# EAGLE board panelized (EAGLE 9.1.3)
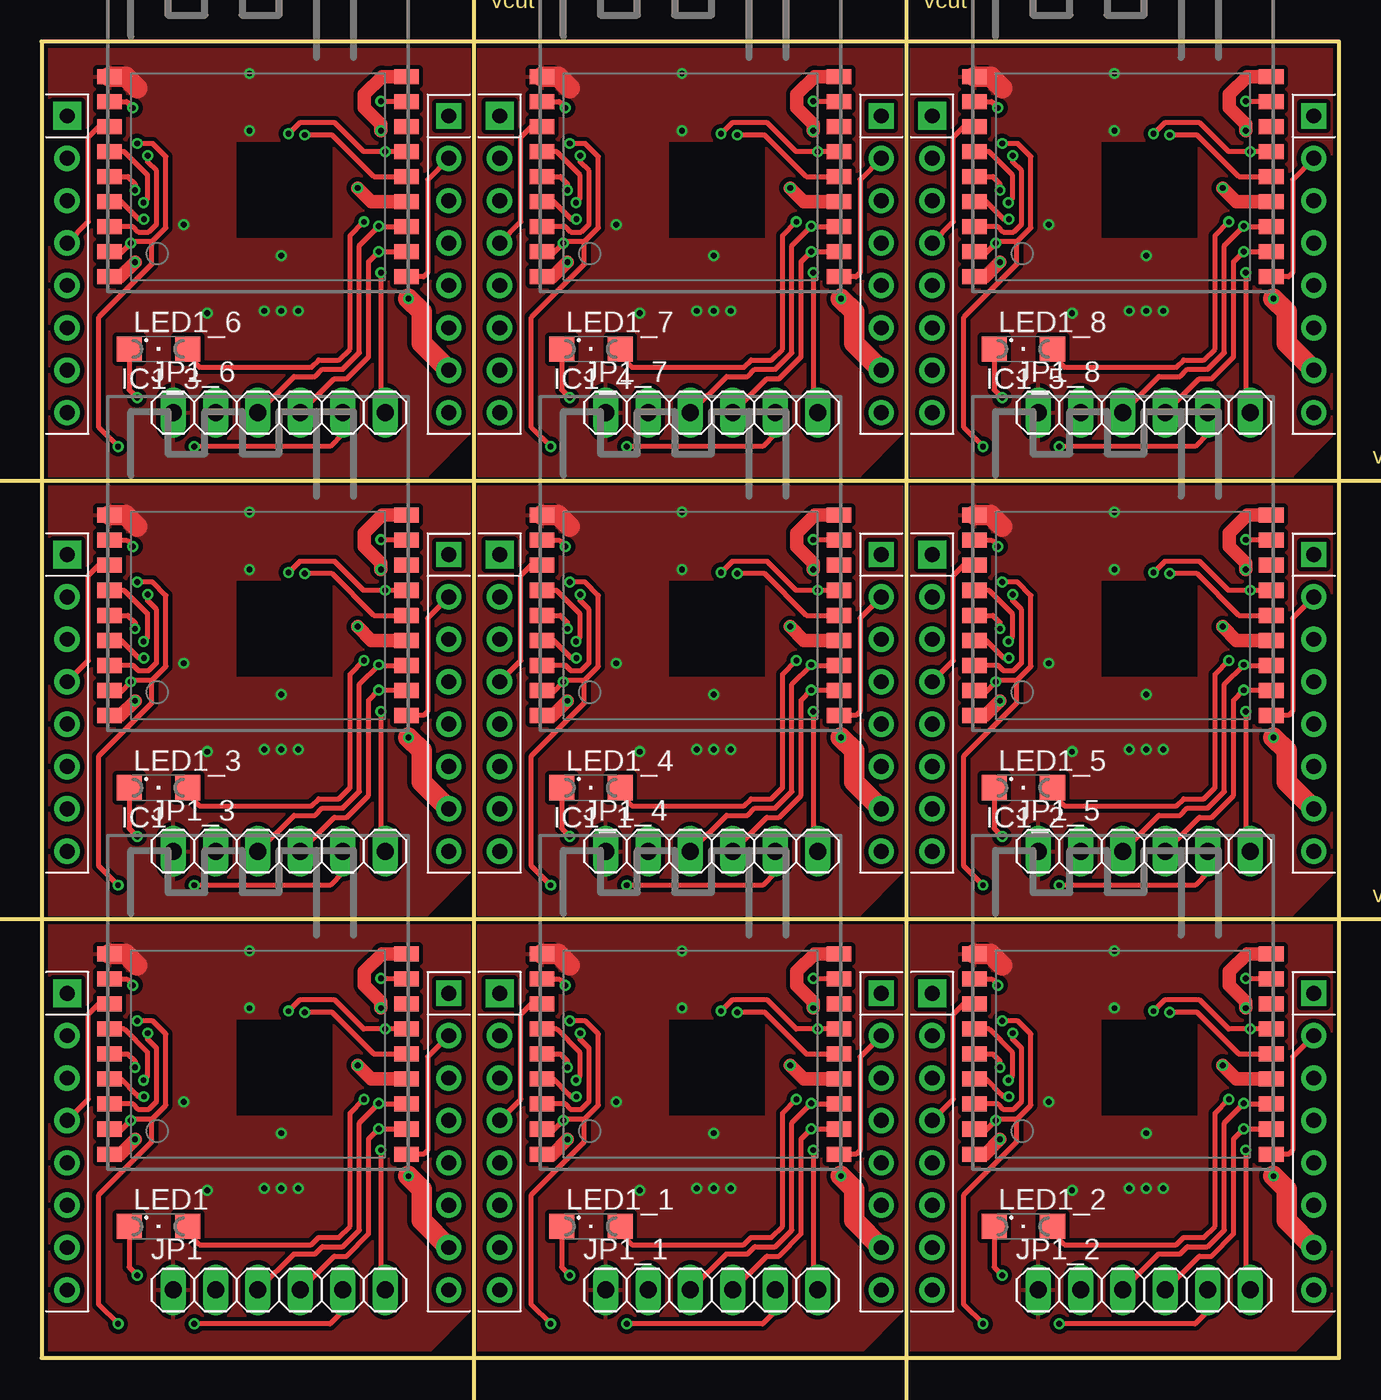
[diagram p0: board, top side]
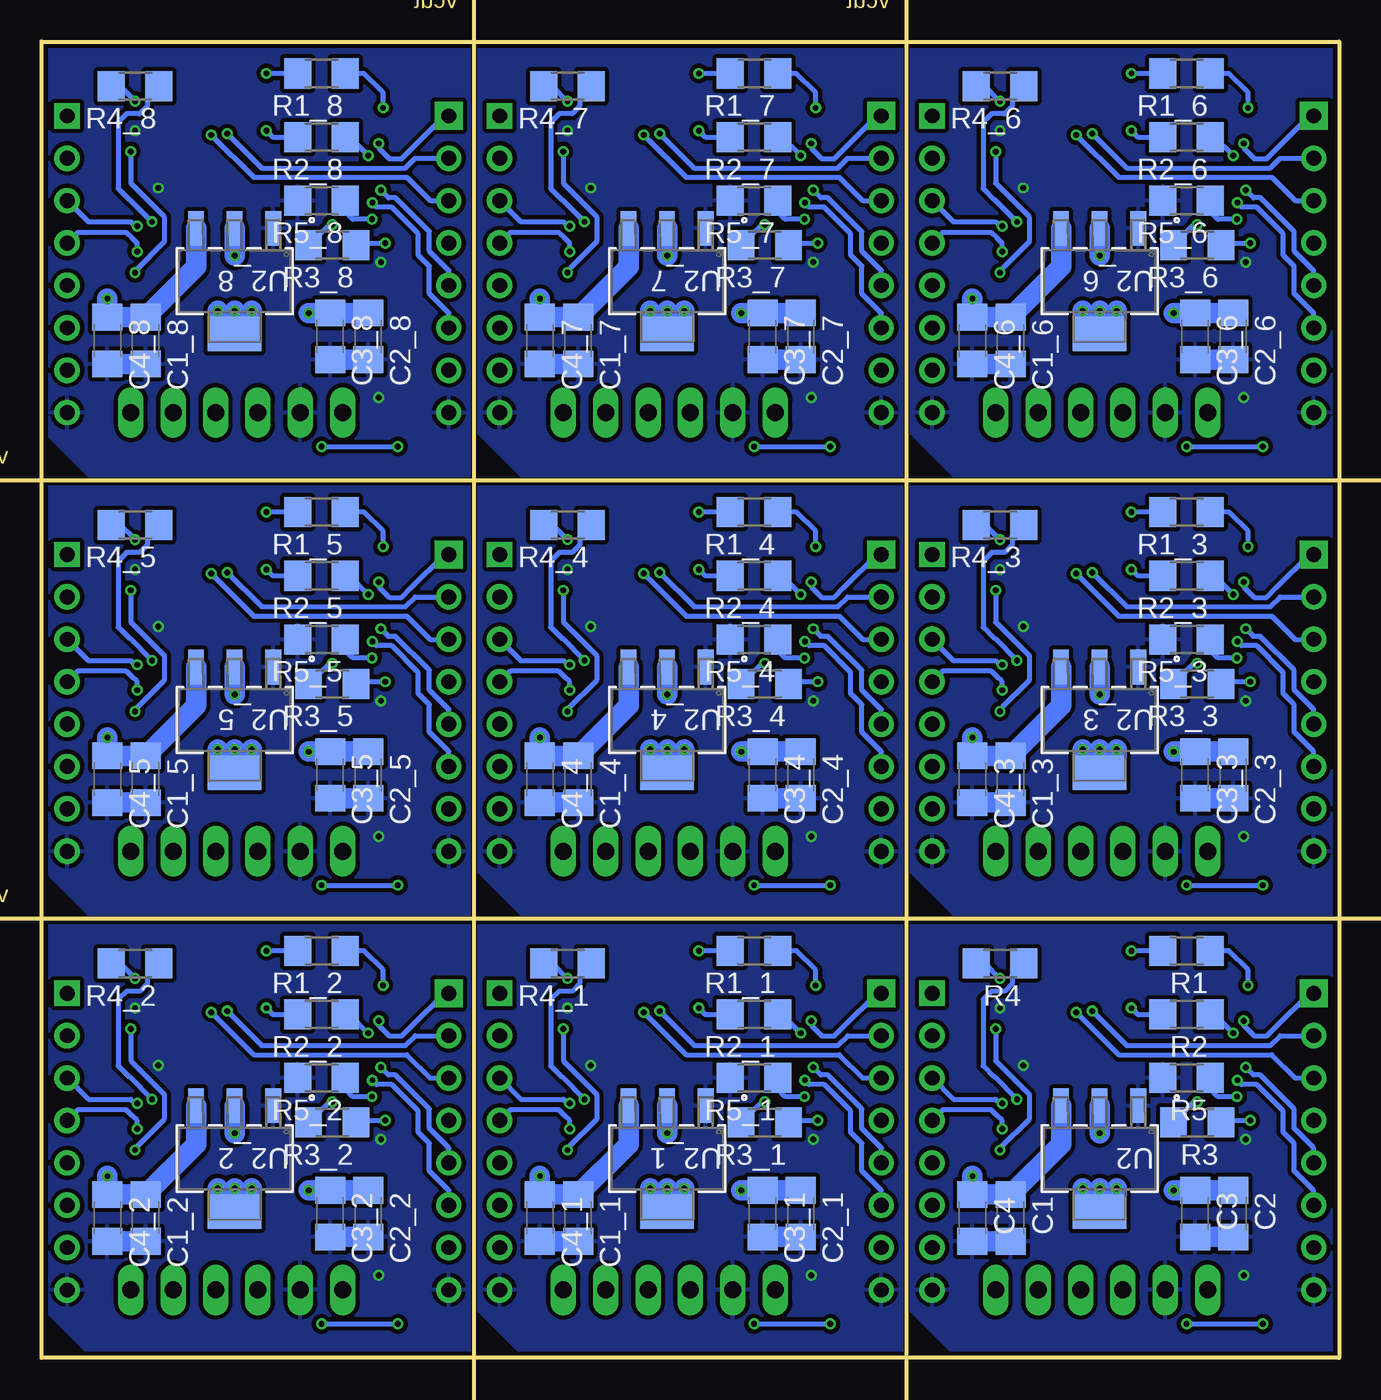
[diagram p1: board, bottom side, seen from below]

Size 77.72 x 78.87 mm. Coordinates in mm from the lower left corner, seen from the top.
Outline: 0,0 77.72,0 77.72,78.87 0,78.87 0,0
Copper layers (1*16): Top 0.035mm / dielectric 1.5mm / Bottom 0.035mm
Design rules "BrainPadWiFi": minimum track width 6mil, minimum drill 12mil, track to track 10mil, track to pad 10mil, pad to pad 0.205mm, via to via 0.205mm, smd to smd 0mil, copper to edge 10mil, drill to drill 10mil, minimum pad ring 10mil, minimum via ring 6mil, stop-mask expansion 2mil, vias tented up to drill 100mil, thermal gap 10mil
Milling: 4 lines

## Footprints (pad centres in the part's own frame; a part is rotated, then mirrored left to right if it is on the bottom)
C1206 = smd 1.6 x 1.8: 1 -1.4,0; 2 1.4,0
FRONT-FACE = smd 1.485 x 0.9: 1 -8.893,4.9; 2 -8.893,3.4; 3 -8.893,1.9; 4 -8.893,0.4; 5 -8.893,-1.1; 6 -8.893,-2.6; 7 -8.893,-4.1; 8 -8.893,-5.6; 9 -8.893,-7.1; 10 8.893,-7.1; 11 8.893,-5.6; 12 8.893,-4.1; 13 8.893,-2.6; 14 8.893,-1.1; 15 8.893,0.4; 16 8.893,1.9; 17 8.893,3.4; 18 8.893,4.9
1X06 = drill 1.016 long: 1 -6.35,0; 2 -3.81,0; 3 -1.27,0; 4 1.27,0; 5 3.81,0; 6 6.35,0
SML1206 = smd 1.5 x 1.5: A 1.75,0; C -1.75,0
R1206 = smd 1.6 x 1.803: 1 -1.422,0; 2 1.422,0
DCY4-M = smd 0.94 x 2.07: 1 -2.311,-3.169; 2 0,-3.169; 3 2.311,-3.169 | smd 3.2 x 2.07: 4 0,3.169
MIKROE_BUS_MINI = drill 0.889 pad 1.676 square: P$1 1.27,21.59 | drill 0.889 pad 1.524: P$2 1.27,19.05; P$3 1.27,16.51; P$4 1.27,13.97; P$5 1.27,11.43; P$6 1.27,8.89; P$7 1.27,6.35; P$8 1.27,3.81; P$9 24.13,3.81; P$10 24.13,6.35; P$11 24.13,8.89; P$12 24.13,11.43; P$13 24.13,13.97; P$14 24.13,16.51; P$15 24.13,19.05 | drill 0.889 pad 1.524 square: P$16 24.13,21.59

## Placement (x,y rotation side)
C1  47u  [C1206]  19.68,8.38 270 bottom
C1_1  47u  [C1206]  45.59,8.38 270 bottom
C1_2  47u  [C1206]  71.5,8.38 270 bottom
C1_3  47u  [C1206]  19.68,34.67 270 bottom
C1_4  47u  [C1206]  45.59,34.67 270 bottom
C1_5  47u  [C1206]  71.5,34.67 270 bottom
C1_6  47u  [C1206]  19.68,60.96 270 bottom
C1_7  47u  [C1206]  45.59,60.96 270 bottom
C1_8  47u  [C1206]  71.5,60.96 270 bottom
C2  0.47u  [C1206]  6.35,8.64 270 bottom
C2_1  0.47u  [C1206]  32.26,8.64 270 bottom
C2_2  0.47u  [C1206]  58.17,8.64 270 bottom
C2_3  0.47u  [C1206]  6.35,34.92 270 bottom
C2_4  0.47u  [C1206]  32.26,34.92 270 bottom
C2_5  0.47u  [C1206]  58.17,34.92 270 bottom
C2_6  0.47u  [C1206]  6.35,61.21 270 bottom
C2_7  0.47u  [C1206]  32.26,61.21 270 bottom
C2_8  0.47u  [C1206]  58.17,61.21 270 bottom
C3  47u  [C1206]  8.64,8.64 270 bottom
C3_1  47u  [C1206]  34.54,8.64 270 bottom
C3_2  47u  [C1206]  60.45,8.64 270 bottom
C3_3  47u  [C1206]  8.64,34.92 270 bottom
C3_4  47u  [C1206]  34.54,34.92 270 bottom
C3_5  47u  [C1206]  60.45,34.92 270 bottom
C3_6  47u  [C1206]  8.64,61.21 270 bottom
C3_7  47u  [C1206]  34.54,61.21 270 bottom
C3_8  47u  [C1206]  60.45,61.21 270 bottom
C4  0.47u  [C1206]  21.97,8.38 270 bottom
C4_1  0.47u  [C1206]  47.88,8.38 270 bottom
C4_2  0.47u  [C1206]  73.79,8.38 270 bottom
C4_3  0.47u  [C1206]  21.97,34.67 270 bottom
C4_4  0.47u  [C1206]  47.88,34.67 270 bottom
C4_5  0.47u  [C1206]  73.79,34.67 270 bottom
C4_6  0.47u  [C1206]  21.97,60.96 270 bottom
C4_7  0.47u  [C1206]  47.88,60.96 270 bottom
C4_8  0.47u  [C1206]  73.79,60.96 270 bottom
IC1  ESP-WROOM-02FRONT-FACE  [FRONT-FACE]  12.95,19.3 0 top
IC1_1  ESP-WROOM-02FRONT-FACE  [FRONT-FACE]  38.86,19.3 0 top
IC1_2  ESP-WROOM-02FRONT-FACE  [FRONT-FACE]  64.77,19.3 0 top
IC1_3  ESP-WROOM-02FRONT-FACE  [FRONT-FACE]  12.95,45.59 0 top
IC1_4  ESP-WROOM-02FRONT-FACE  [FRONT-FACE]  38.86,45.59 0 top
IC1_5  ESP-WROOM-02FRONT-FACE  [FRONT-FACE]  64.77,45.59 0 top
IC1_6  ESP-WROOM-02FRONT-FACE  [FRONT-FACE]  12.95,71.88 0 top
IC1_7  ESP-WROOM-02FRONT-FACE  [FRONT-FACE]  38.86,71.88 0 top
IC1_8  ESP-WROOM-02FRONT-FACE  [FRONT-FACE]  64.77,71.88 0 top
JP1  JP1  [1X06]  14.22,4.06 0 top
JP1_1  JP1  [1X06]  40.13,4.06 0 top
JP1_2  JP1  [1X06]  66.04,4.06 0 top
JP1_3  JP1  [1X06]  14.22,30.35 0 top
JP1_4  JP1  [1X06]  40.13,30.35 0 top
JP1_5  JP1  [1X06]  66.04,30.35 0 top
JP1_6  JP1  [1X06]  14.22,56.64 0 top
JP1_7  JP1  [1X06]  40.13,56.64 0 top
JP1_8  JP1  [1X06]  66.04,56.64 0 top
LED1  STATUS  [SML1206]  6.99,7.87 0 top
LED1_1  STATUS  [SML1206]  32.89,7.87 0 top
LED1_2  STATUS  [SML1206]  58.8,7.87 0 top
LED1_3  STATUS  [SML1206]  6.99,34.16 0 top
LED1_4  STATUS  [SML1206]  32.89,34.16 0 top
LED1_5  STATUS  [SML1206]  58.8,34.16 0 top
LED1_6  STATUS  [SML1206]  6.99,60.45 0 top
LED1_7  STATUS  [SML1206]  32.89,60.45 0 top
LED1_8  STATUS  [SML1206]  58.8,60.45 0 top
R1  10K  [R1206]  9.14,24.38 180 bottom
R1_1  10K  [R1206]  35.05,24.38 180 bottom
R1_2  10K  [R1206]  60.96,24.38 180 bottom
R1_3  10K  [R1206]  9.14,50.67 180 bottom
R1_4  10K  [R1206]  35.05,50.67 180 bottom
R1_5  10K  [R1206]  60.96,50.67 180 bottom
R1_6  10K  [R1206]  9.14,76.96 180 bottom
R1_7  10K  [R1206]  35.05,76.96 180 bottom
R1_8  10K  [R1206]  60.96,76.96 180 bottom
R2  10K  [R1206]  9.14,20.57 180 bottom
R2_1  10K  [R1206]  35.05,20.57 180 bottom
R2_2  10K  [R1206]  60.96,20.57 180 bottom
R2_3  10K  [R1206]  9.14,46.86 180 bottom
R2_4  10K  [R1206]  35.05,46.86 180 bottom
R2_5  10K  [R1206]  60.96,46.86 180 bottom
R2_6  10K  [R1206]  9.14,73.15 180 bottom
R2_7  10K  [R1206]  35.05,73.15 180 bottom
R2_8  10K  [R1206]  60.96,73.15 180 bottom
R3  10K  [R1206]  8.51,14.1 180 bottom
R3_1  10K  [R1206]  34.42,14.1 180 bottom
R3_2  10K  [R1206]  60.33,14.1 180 bottom
R3_3  10K  [R1206]  8.51,40.39 180 bottom
R3_4  10K  [R1206]  34.42,40.39 180 bottom
R3_5  10K  [R1206]  60.33,40.39 180 bottom
R3_6  10K  [R1206]  8.51,66.67 180 bottom
R3_7  10K  [R1206]  34.42,66.67 180 bottom
R3_8  10K  [R1206]  60.33,66.67 180 bottom
R4  470  [R1206]  20.32,23.62 180 bottom
R4_1  470  [R1206]  46.23,23.62 180 bottom
R4_2  470  [R1206]  72.14,23.62 180 bottom
R4_3  470  [R1206]  20.32,49.91 180 bottom
R4_4  470  [R1206]  46.23,49.91 180 bottom
R4_5  470  [R1206]  72.14,49.91 180 bottom
R4_6  470  [R1206]  20.32,76.2 180 bottom
R4_7  470  [R1206]  46.23,76.2 180 bottom
R4_8  470  [R1206]  72.14,76.2 180 bottom
R5  10K  [R1206]  9.14,16.76 180 bottom
R5_1  10K  [R1206]  35.05,16.76 180 bottom
R5_2  10K  [R1206]  60.96,16.76 180 bottom
R5_3  10K  [R1206]  9.14,43.05 180 bottom
R5_4  10K  [R1206]  35.05,43.05 180 bottom
R5_5  10K  [R1206]  60.96,43.05 180 bottom
R5_6  10K  [R1206]  9.14,69.34 180 bottom
R5_7  10K  [R1206]  35.05,69.34 180 bottom
R5_8  10K  [R1206]  60.96,69.34 180 bottom
U2  TLV1117LV33DCYRDCY4-M  [DCY4-M]  14.35,11.94 180 bottom
U2_1  TLV1117LV33DCYRDCY4-M  [DCY4-M]  40.26,11.94 180 bottom
U2_2  TLV1117LV33DCYRDCY4-M  [DCY4-M]  66.17,11.94 180 bottom
U2_3  TLV1117LV33DCYRDCY4-M  [DCY4-M]  14.35,38.23 180 bottom
U2_4  TLV1117LV33DCYRDCY4-M  [DCY4-M]  40.26,38.23 180 bottom
U2_5  TLV1117LV33DCYRDCY4-M  [DCY4-M]  66.17,38.23 180 bottom
U2_6  TLV1117LV33DCYRDCY4-M  [DCY4-M]  14.35,64.52 180 bottom
U2_7  TLV1117LV33DCYRDCY4-M  [DCY4-M]  40.26,64.52 180 bottom
U2_8  TLV1117LV33DCYRDCY4-M  [DCY4-M]  66.17,64.52 180 bottom
U$1  MIKROE_CLICKMINI  [MIKROE_BUS_MINI]  0.25,0.25 0 top
U$1_1  MIKROE_CLICKMINI  [MIKROE_BUS_MINI]  26.16,0.25 0 top
U$1_2  MIKROE_CLICKMINI  [MIKROE_BUS_MINI]  52.07,0.25 0 top
U$1_3  MIKROE_CLICKMINI  [MIKROE_BUS_MINI]  0.25,26.54 0 top
U$1_4  MIKROE_CLICKMINI  [MIKROE_BUS_MINI]  26.16,26.54 0 top
U$1_5  MIKROE_CLICKMINI  [MIKROE_BUS_MINI]  52.07,26.54 0 top
U$1_6  MIKROE_CLICKMINI  [MIKROE_BUS_MINI]  0.25,52.83 0 top
U$1_7  MIKROE_CLICKMINI  [MIKROE_BUS_MINI]  26.16,52.83 0 top
U$1_8  MIKROE_CLICKMINI  [MIKROE_BUS_MINI]  52.07,52.83 0 top

## Library data of the parts
C1 C1_1-C1_8 C2 C2_1-C2_8 C3 C3_1-C3_8 C4 C4_1-C4_8 IC1 IC1_1-IC1_8 JP1 JP1_1-JP1_8 LED1 LED1_1-LED1_8 R1 R1_1-R1_8 R2 R2_1-R2_8 R3 R3_1-R3_8 R4 R4_1-R4_8 R5 R5_1-R5_8 U$1 U$1_1-U$1_8 = BrainPadWiFi
U2 U2_1-U2_8 = BrainPadWiFi; MANUFACTURER_PART_NUMBER: TLV1117LV33DCYR; VENDOR: Texas Instruments

## Nets
3V3: C2.1 C3.1 IC1.1 JP1.1 R1.2 R2.2 R3.2 U2.2 U2.4
3V3_1: C2_1.1 C3_1.1 IC1_1.1 JP1_1.1 R1_1.2 R2_1.2 R3_1.2 U2_1.2 U2_1.4
3V3_2: C2_2.1 C3_2.1 IC1_2.1 JP1_2.1 R1_2.2 R2_2.2 R3_2.2 U2_2.2 U2_2.4
3V3_3: C2_3.1 C3_3.1 IC1_3.1 JP1_3.1 R1_3.2 R2_3.2 R3_3.2 U2_3.2 U2_3.4
3V3_4: C2_4.1 C3_4.1 IC1_4.1 JP1_4.1 R1_4.2 R2_4.2 R3_4.2 U2_4.2 U2_4.4
3V3_5: C2_5.1 C3_5.1 IC1_5.1 JP1_5.1 R1_5.2 R2_5.2 R3_5.2 U2_5.2 U2_5.4
3V3_6: C2_6.1 C3_6.1 IC1_6.1 JP1_6.1 R1_6.2 R2_6.2 R3_6.2 U2_6.2 U2_6.4
3V3_7: C2_7.1 C3_7.1 IC1_7.1 JP1_7.1 R1_7.2 R2_7.2 R3_7.2 U2_7.2 U2_7.4
3V3_8: C2_8.1 C3_8.1 IC1_8.1 JP1_8.1 R1_8.2 R2_8.2 R3_8.2 U2_8.2 U2_8.4
5V: C1.1 C4.1 U2.3 U$1.P$10
5V_1: C1_1.1 C4_1.1 U2_1.3 U$1_1.P$10
5V_2: C1_2.1 C4_2.1 U2_2.3 U$1_2.P$10
5V_3: C1_3.1 C4_3.1 U2_3.3 U$1_3.P$10
5V_4: C1_4.1 C4_4.1 U2_4.3 U$1_4.P$10
5V_5: C1_5.1 C4_5.1 U2_5.3 U$1_5.P$10
5V_6: C1_6.1 C4_6.1 U2_6.3 U$1_6.P$10
5V_7: C1_7.1 C4_7.1 U2_7.3 U$1_7.P$10
5V_8: C1_8.1 C4_8.1 U2_8.3 U$1_8.P$10
CS: IC1.14 U$1.P$3
CS_1: IC1_1.14 U$1_1.P$3
CS_2: IC1_2.14 U$1_2.P$3
CS_3: IC1_3.14 U$1_3.P$3
CS_4: IC1_4.14 U$1_4.P$3
CS_5: IC1_5.14 U$1_5.P$3
CS_6: IC1_6.14 U$1_6.P$3
CS_7: IC1_7.14 U$1_7.P$3
CS_8: IC1_8.14 U$1_8.P$3
EN: IC1.2 R1.1
EN_1: IC1_1.2 R1_1.1
EN_2: IC1_2.2 R1_2.1
EN_3: IC1_3.2 R1_3.1
EN_4: IC1_4.2 R1_4.1
EN_5: IC1_5.2 R1_5.1
EN_6: IC1_6.2 R1_6.1
EN_7: IC1_7.2 R1_7.1
EN_8: IC1_8.2 R1_8.1
GND: C1.2 C2.2 C3.2 C4.2 IC1.9 IC1.13 IC1.18 JP1.2 LED1.C R5.2 U2.1 U$1.P$8 U$1.P$9
GND_1: C1_1.2 C2_1.2 C3_1.2 C4_1.2 IC1_1.9 IC1_1.13 IC1_1.18 JP1_1.2 LED1_1.C R5_1.2 U2_1.1 U$1_1.P$8 U$1_1.P$9
GND_2: C1_2.2 C2_2.2 C3_2.2 C4_2.2 IC1_2.9 IC1_2.13 IC1_2.18 JP1_2.2 LED1_2.C R5_2.2 U2_2.1 U$1_2.P$8 U$1_2.P$9
GND_3: C1_3.2 C2_3.2 C3_3.2 C4_3.2 IC1_3.9 IC1_3.13 IC1_3.18 JP1_3.2 LED1_3.C R5_3.2 U2_3.1 U$1_3.P$8 U$1_3.P$9
GND_4: C1_4.2 C2_4.2 C3_4.2 C4_4.2 IC1_4.9 IC1_4.13 IC1_4.18 JP1_4.2 LED1_4.C R5_4.2 U2_4.1 U$1_4.P$8 U$1_4.P$9
GND_5: C1_5.2 C2_5.2 C3_5.2 C4_5.2 IC1_5.9 IC1_5.13 IC1_5.18 JP1_5.2 LED1_5.C R5_5.2 U2_5.1 U$1_5.P$8 U$1_5.P$9
GND_6: C1_6.2 C2_6.2 C3_6.2 C4_6.2 IC1_6.9 IC1_6.13 IC1_6.18 JP1_6.2 LED1_6.C R5_6.2 U2_6.1 U$1_6.P$8 U$1_6.P$9
GND_7: C1_7.2 C2_7.2 C3_7.2 C4_7.2 IC1_7.9 IC1_7.13 IC1_7.18 JP1_7.2 LED1_7.C R5_7.2 U2_7.1 U$1_7.P$8 U$1_7.P$9
GND_8: C1_8.2 C2_8.2 C3_8.2 C4_8.2 IC1_8.9 IC1_8.13 IC1_8.18 JP1_8.2 LED1_8.C R5_8.2 U2_8.1 U$1_8.P$8 U$1_8.P$9
INT: IC1.10 U$1.P$15
INT_1: IC1_1.10 U$1_1.P$15
INT_2: IC1_2.10 U$1_2.P$15
INT_3: IC1_3.10 U$1_3.P$15
INT_4: IC1_4.10 U$1_4.P$15
INT_5: IC1_5.10 U$1_5.P$15
INT_6: IC1_6.10 U$1_6.P$15
INT_7: IC1_7.10 U$1_7.P$15
INT_8: IC1_8.10 U$1_8.P$15
IO16: IC1.17 R4.2
IO16_1: IC1_1.17 R4_1.2
IO16_2: IC1_2.17 R4_2.2
IO16_3: IC1_3.17 R4_3.2
IO16_4: IC1_4.17 R4_4.2
IO16_5: IC1_5.17 R4_5.2
IO16_6: IC1_6.17 R4_6.2
IO16_7: IC1_7.17 R4_7.2
IO16_8: IC1_8.17 R4_8.2
MISO: IC1.5 U$1.P$5
MISO_1: IC1_1.5 U$1_1.P$5
MISO_2: IC1_2.5 U$1_2.P$5
MISO_3: IC1_3.5 U$1_3.P$5
MISO_4: IC1_4.5 U$1_4.P$5
MISO_5: IC1_5.5 U$1_5.P$5
MISO_6: IC1_6.5 U$1_6.P$5
MISO_7: IC1_7.5 U$1_7.P$5
MISO_8: IC1_8.5 U$1_8.P$5
MOSI: IC1.4 U$1.P$6
MOSI_1: IC1_1.4 U$1_1.P$6
MOSI_2: IC1_2.4 U$1_2.P$6
MOSI_3: IC1_3.4 U$1_3.P$6
MOSI_4: IC1_4.4 U$1_4.P$6
MOSI_5: IC1_5.4 U$1_5.P$6
MOSI_6: IC1_6.4 U$1_6.P$6
MOSI_7: IC1_7.4 U$1_7.P$6
MOSI_8: IC1_8.4 U$1_8.P$6
N$1: IC1.7 R2.1
N$1_1: IC1_1.7 R2_1.1
N$1_2: IC1_2.7 R2_2.1
N$1_3: IC1_3.7 R2_3.1
N$1_4: IC1_4.7 R2_4.1
N$1_5: IC1_5.7 R2_5.1
N$1_6: IC1_6.7 R2_6.1
N$1_7: IC1_7.7 R2_7.1
N$1_8: IC1_8.7 R2_8.1
N$4: IC1.6 R5.1
N$4_1: IC1_1.6 R5_1.1
N$4_2: IC1_2.6 R5_2.1
N$4_3: IC1_3.6 R5_3.1
N$4_4: IC1_4.6 R5_4.1
N$4_5: IC1_5.6 R5_5.1
N$4_6: IC1_6.6 R5_6.1
N$4_7: IC1_7.6 R5_7.1
N$4_8: IC1_8.6 R5_8.1
PROG: IC1.8 JP1.5 R3.1 U$1.P$1
PROG_1: IC1_1.8 JP1_1.5 R3_1.1 U$1_1.P$1
PROG_2: IC1_2.8 JP1_2.5 R3_2.1 U$1_2.P$1
PROG_3: IC1_3.8 JP1_3.5 R3_3.1 U$1_3.P$1
PROG_4: IC1_4.8 JP1_4.5 R3_4.1 U$1_4.P$1
PROG_5: IC1_5.8 JP1_5.5 R3_5.1 U$1_5.P$1
PROG_6: IC1_6.8 JP1_6.5 R3_6.1 U$1_6.P$1
PROG_7: IC1_7.8 JP1_7.5 R3_7.1 U$1_7.P$1
PROG_8: IC1_8.8 JP1_8.5 R3_8.1 U$1_8.P$1
RST: IC1.15 JP1.6 U$1.P$2
RST_1: IC1_1.15 JP1_1.6 U$1_1.P$2
RST_2: IC1_2.15 JP1_2.6 U$1_2.P$2
RST_3: IC1_3.15 JP1_3.6 U$1_3.P$2
RST_4: IC1_4.15 JP1_4.6 U$1_4.P$2
RST_5: IC1_5.15 JP1_5.6 U$1_5.P$2
RST_6: IC1_6.15 JP1_6.6 U$1_6.P$2
RST_7: IC1_7.15 JP1_7.6 U$1_7.P$2
RST_8: IC1_8.15 JP1_8.6 U$1_8.P$2
RX: IC1.12 JP1.3 U$1.P$14
RX_1: IC1_1.12 JP1_1.3 U$1_1.P$14
RX_2: IC1_2.12 JP1_2.3 U$1_2.P$14
RX_3: IC1_3.12 JP1_3.3 U$1_3.P$14
RX_4: IC1_4.12 JP1_4.3 U$1_4.P$14
RX_5: IC1_5.12 JP1_5.3 U$1_5.P$14
RX_6: IC1_6.12 JP1_6.3 U$1_6.P$14
RX_7: IC1_7.12 JP1_7.3 U$1_7.P$14
RX_8: IC1_8.12 JP1_8.3 U$1_8.P$14
SCK: IC1.3 U$1.P$4
SCK_1: IC1_1.3 U$1_1.P$4
SCK_2: IC1_2.3 U$1_2.P$4
SCK_3: IC1_3.3 U$1_3.P$4
SCK_4: IC1_4.3 U$1_4.P$4
SCK_5: IC1_5.3 U$1_5.P$4
SCK_6: IC1_6.3 U$1_6.P$4
SCK_7: IC1_7.3 U$1_7.P$4
SCK_8: IC1_8.3 U$1_8.P$4
STAT: LED1.A R4.1
STAT_1: LED1_1.A R4_1.1
STAT_2: LED1_2.A R4_2.1
STAT_3: LED1_3.A R4_3.1
STAT_4: LED1_4.A R4_4.1
STAT_5: LED1_5.A R4_5.1
STAT_6: LED1_6.A R4_6.1
STAT_7: LED1_7.A R4_7.1
STAT_8: LED1_8.A R4_8.1
TX: IC1.11 JP1.4 U$1.P$13
TX_1: IC1_1.11 JP1_1.4 U$1_1.P$13
TX_2: IC1_2.11 JP1_2.4 U$1_2.P$13
TX_3: IC1_3.11 JP1_3.4 U$1_3.P$13
TX_4: IC1_4.11 JP1_4.4 U$1_4.P$13
TX_5: IC1_5.11 JP1_5.4 U$1_5.P$13
TX_6: IC1_6.11 JP1_6.4 U$1_6.P$13
TX_7: IC1_7.11 JP1_7.4 U$1_7.P$13
TX_8: IC1_8.11 JP1_8.4 U$1_8.P$13

## Tracks (layer width: path | path; a pad name or v marks a point on that pad's centre or on a via)
3V3  (via drill 0.35)
  Top 1.219: 5.74,23.52 5.05,24.2 IC1.1
  Bottom 0.305: v12.45,20.95 12.06,20.57 R2.2 | R1.2 v12.45,24.38 | R3.2 8.7,15.33 v8.51,15.33
  Bottom 1.219: C2.1 C3.1 v9.9,10.04 v9.91,10.03 | U2.2 v14.35,13.46 | U2.4 13.34,9.79 v13.34,10.16 | U2.4 v14.35,10.16 | U2.4 15.37,9.79 v15.37,10.16
  pour Top: 0.25,25.91 25.65,25.91 25.65,2.79 23.11,0.25 0.25,0.25
3V3_1  (via drill 0.35)
  Top 1.219: 31.64,23.52 30.95,24.2 IC1_1.1
  Bottom 0.305: v38.35,20.95 37.97,20.57 R2_1.2 | R1_1.2 v38.35,24.38 | R3_1.2 34.61,15.33 v34.42,15.33
  Bottom 1.219: C2_1.1 C3_1.1 v35.81,10.04 v35.81,10.03 | U2_1.2 v40.26,13.46 | U2_1.4 39.24,9.79 v39.24,10.16 | U2_1.4 v40.26,10.16 | U2_1.4 41.27,9.79 v41.27,10.16
  pour Top: 26.16,25.91 51.56,25.91 51.56,2.79 49.02,0.25 26.16,0.25
3V3_2  (via drill 0.35)
  Top 1.219: 57.55,23.52 56.86,24.2 IC1_2.1
  Bottom 0.305: v64.26,20.95 63.88,20.57 R2_2.2 | R1_2.2 v64.26,24.38 | R3_2.2 60.51,15.33 v60.33,15.33
  Bottom 1.219: C2_2.1 C3_2.1 v61.72,10.04 v61.72,10.03 | U2_2.2 v66.17,13.46 | U2_2.4 65.15,9.79 v65.15,10.16 | U2_2.4 v66.17,10.16 | U2_2.4 67.18,9.79 v67.18,10.16
  pour Top: 52.07,25.91 77.47,25.91 77.47,2.79 74.93,0.25 52.07,0.25
3V3_3  (via drill 0.35)
  Top 1.219: 5.74,49.8 5.05,50.49 IC1_3.1
  Bottom 0.305: v12.45,47.24 12.06,46.86 R2_3.2 | R1_3.2 v12.45,50.67 | R3_3.2 8.7,41.62 v8.51,41.62
  Bottom 1.219: C2_3.1 C3_3.1 v9.9,36.33 v9.91,36.32 | U2_3.2 v14.35,39.75 | U2_3.4 13.34,36.07 v13.34,36.45 | U2_3.4 v14.35,36.45 | U2_3.4 15.37,36.07 v15.37,36.45
  pour Top: 0.25,52.2 25.65,52.2 25.65,29.08 23.11,26.54 0.25,26.54
3V3_4  (via drill 0.35)
  Top 1.219: 31.64,49.8 30.95,50.49 IC1_4.1
  Bottom 0.305: v38.35,47.24 37.97,46.86 R2_4.2 | R1_4.2 v38.35,50.67 | R3_4.2 34.61,41.62 v34.42,41.62
  Bottom 1.219: C2_4.1 C3_4.1 v35.81,36.33 v35.81,36.32 | U2_4.2 v40.26,39.75 | U2_4.4 39.24,36.07 v39.24,36.45 | U2_4.4 v40.26,36.45 | U2_4.4 41.27,36.07 v41.27,36.45
  pour Top: 26.16,52.2 51.56,52.2 51.56,29.08 49.02,26.54 26.16,26.54
3V3_5  (via drill 0.35)
  Top 1.219: 57.55,49.8 56.86,50.49 IC1_5.1
  Bottom 0.305: v64.26,47.24 63.88,46.86 R2_5.2 | R1_5.2 v64.26,50.67 | R3_5.2 60.51,41.62 v60.33,41.62
  Bottom 1.219: C2_5.1 C3_5.1 v61.72,36.33 v61.72,36.32 | U2_5.2 v66.17,39.75 | U2_5.4 65.15,36.07 v65.15,36.45 | U2_5.4 v66.17,36.45 | U2_5.4 67.18,36.07 v67.18,36.45
  pour Top: 52.07,52.2 77.47,52.2 77.47,29.08 74.93,26.54 52.07,26.54
3V3_6  (via drill 0.35)
  Top 1.219: 5.74,76.09 5.05,76.78 IC1_6.1
  Bottom 0.305: v12.45,73.53 12.06,73.15 R2_6.2 | R1_6.2 v12.45,76.96 | R3_6.2 8.7,67.91 v8.51,67.91
  Bottom 1.219: C2_6.1 C3_6.1 v9.9,62.61 v9.91,62.61 | U2_6.2 v14.35,66.04 | U2_6.4 13.34,62.36 v13.34,62.74 | U2_6.4 v14.35,62.74 | U2_6.4 15.37,62.36 v15.37,62.74
  pour Top: 0.25,78.49 25.65,78.49 25.65,55.37 23.11,52.83 0.25,52.83
3V3_7  (via drill 0.35)
  Top 1.219: 31.64,76.09 30.95,76.78 IC1_7.1
  Bottom 0.305: v38.35,73.53 37.97,73.15 R2_7.2 | R1_7.2 v38.35,76.96 | R3_7.2 34.61,67.91 v34.42,67.91
  Bottom 1.219: C2_7.1 C3_7.1 v35.81,62.61 | U2_7.2 v40.26,66.04 | U2_7.4 39.24,62.36 v39.24,62.74 | U2_7.4 v40.26,62.74 | U2_7.4 41.27,62.36 v41.27,62.74
  pour Top: 26.16,78.49 51.56,78.49 51.56,55.37 49.02,52.83 26.16,52.83
3V3_8  (via drill 0.35)
  Top 1.219: 57.55,76.09 56.86,76.78 IC1_8.1
  Bottom 0.305: v64.26,73.53 63.88,73.15 R2_8.2 | R1_8.2 v64.26,76.96 | R3_8.2 60.51,67.91 v60.33,67.91
  Bottom 1.219: C2_8.1 C3_8.1 v61.72,62.61 | U2_8.2 v66.17,66.04 | U2_8.4 65.15,62.36 v65.15,62.74 | U2_8.4 v66.17,62.74 | U2_8.4 67.18,62.36 v67.18,62.74
  pour Top: 52.07,78.49 77.47,78.49 77.47,55.37 74.93,52.83 52.07,52.83
5V  (via drill 0.35)
  Top 1.219: U$1.P$10 22.76,8.23 22.76,10.1 v21.97,10.89
  Bottom 1.219: v21.97,10.89 C4.1 C1.1 16.66,12.8 U2.3
5V_1  (via drill 0.35)
  Top 1.219: U$1_1.P$10 48.67,8.23 48.67,10.1 v47.88,10.89
  Bottom 1.219: v47.88,10.89 C4_1.1 C1_1.1 42.57,12.8 U2_1.3
5V_2  (via drill 0.35)
  Top 1.219: U$1_2.P$10 74.57,8.23 74.57,10.1 v73.79,10.89
  Bottom 1.219: v73.79,10.89 C4_2.1 C1_2.1 68.48,12.8 U2_2.3
5V_3  (via drill 0.35)
  Top 1.219: U$1_3.P$10 22.76,34.52 22.76,36.39 v21.97,37.18
  Bottom 1.219: v21.97,37.18 C4_3.1 C1_3.1 16.66,39.09 U2_3.3
5V_4  (via drill 0.35)
  Top 1.219: U$1_4.P$10 48.67,34.52 48.67,36.39 v47.88,37.18
  Bottom 1.219: v47.88,37.18 C4_4.1 C1_4.1 42.57,39.09 U2_4.3
5V_5  (via drill 0.35)
  Top 1.219: U$1_5.P$10 74.57,34.52 74.57,36.39 v73.79,37.18
  Bottom 1.219: v73.79,37.18 C4_5.1 C1_5.1 68.48,39.09 U2_5.3
5V_6  (via drill 0.35)
  Top 1.219: U$1_6.P$10 22.76,60.81 22.76,62.68 v21.97,63.47
  Bottom 1.219: v21.97,63.47 C4_6.1 C1_6.1 16.66,65.38 U2_6.3
5V_7  (via drill 0.35)
  Top 1.219: U$1_7.P$10 48.67,60.81 48.67,62.68 v47.88,63.47
  Bottom 1.219: v47.88,63.47 C4_7.1 C1_7.1 42.57,65.38 U2_7.3
5V_8  (via drill 0.35)
  Top 1.219: U$1_8.P$10 74.57,60.81 74.57,62.68 v73.79,63.47
  Bottom 1.219: v73.79,63.47 C4_8.1 C1_8.1 68.48,65.38 U2_8.3
CS  (via drill 0.35)
  Top 0.305: IC1.14 19.9,18.2 17.4,20.7 v15.75,20.7
  Bottom 0.305: U$1.P$3 2.64,16.76 4.04,18.16 13.21,18.16 v15.75,20.7
CS_1  (via drill 0.35)
  Top 0.305: IC1_1.14 45.8,18.2 43.31,20.7 v41.66,20.7
  Bottom 0.305: U$1_1.P$3 28.55,16.76 29.94,18.16 39.12,18.16 v41.66,20.7
CS_2  (via drill 0.35)
  Top 0.305: IC1_2.14 71.71,18.2 69.22,20.7 v67.56,20.7
  Bottom 0.305: U$1_2.P$3 54.45,16.76 55.85,18.16 65.02,18.16 v67.56,20.7
CS_3  (via drill 0.35)
  Top 0.305: IC1_3.14 19.9,44.49 17.4,46.99 v15.75,46.99
  Bottom 0.305: U$1_3.P$3 2.64,43.05 4.04,44.45 13.21,44.45 v15.75,46.99
CS_4  (via drill 0.35)
  Top 0.305: IC1_4.14 45.8,44.49 43.31,46.99 v41.66,46.99
  Bottom 0.305: U$1_4.P$3 28.55,43.05 29.94,44.45 39.12,44.45 v41.66,46.99
CS_5  (via drill 0.35)
  Top 0.305: IC1_5.14 71.71,44.49 69.22,46.99 v67.56,46.99
  Bottom 0.305: U$1_5.P$3 54.45,43.05 55.85,44.45 65.02,44.45 v67.56,46.99
CS_6  (via drill 0.35)
  Top 0.305: IC1_6.14 19.9,70.78 17.4,73.28 v15.75,73.28
  Bottom 0.305: U$1_6.P$3 2.64,69.34 4.04,70.74 13.21,70.74 v15.75,73.28
CS_7  (via drill 0.35)
  Top 0.305: IC1_7.14 45.8,70.78 43.31,73.28 v41.66,73.28
  Bottom 0.305: U$1_7.P$3 28.55,69.34 29.94,70.74 39.12,70.74 v41.66,73.28
CS_8  (via drill 0.35)
  Top 0.305: IC1_8.14 71.71,70.78 69.22,73.28 v67.56,73.28
  Bottom 0.305: U$1_8.P$3 54.45,69.34 55.85,70.74 65.02,70.74 v67.56,73.28
EN  (via drill 0.35)
  Top 0.305: IC1.2 5.08,22.7 v5.46,22.32
  Bottom 0.305: 7.74,24.13 R1.1 | 7.72,24.11 R1.1 | v5.46,22.32 5.46,23.24 6.6,24.38 R1.1
EN_1  (via drill 0.35)
  Top 0.305: IC1_1.2 30.99,22.7 v31.37,22.32
  Bottom 0.305: 33.65,24.13 R1_1.1 | 33.63,24.11 R1_1.1 | v31.37,22.32 31.37,23.24 32.51,24.38 R1_1.1
EN_2  (via drill 0.35)
  Top 0.305: IC1_2.2 56.9,22.7 v57.28,22.32
  Bottom 0.305: 59.56,24.13 R1_2.1 | 59.54,24.11 R1_2.1 | v57.28,22.32 57.28,23.24 58.42,24.38 R1_2.1
EN_3  (via drill 0.35)
  Top 0.305: IC1_3.2 5.08,48.99 v5.46,48.61
  Bottom 0.305: 7.74,50.42 R1_3.1 | 7.72,50.39 R1_3.1 | v5.46,48.61 5.46,49.53 6.6,50.67 R1_3.1
EN_4  (via drill 0.35)
  Top 0.305: IC1_4.2 30.99,48.99 v31.37,48.61
  Bottom 0.305: 33.65,50.42 R1_4.1 | 33.63,50.39 R1_4.1 | v31.37,48.61 31.37,49.53 32.51,50.67 R1_4.1
EN_5  (via drill 0.35)
  Top 0.305: IC1_5.2 56.9,48.99 v57.28,48.61
  Bottom 0.305: 59.56,50.42 R1_5.1 | 59.54,50.39 R1_5.1 | v57.28,48.61 57.28,49.53 58.42,50.67 R1_5.1
EN_6  (via drill 0.35)
  Top 0.305: IC1_6.2 5.08,75.28 v5.46,74.9
  Bottom 0.305: 7.74,76.7 R1_6.1 | 7.72,76.68 R1_6.1 | v5.46,74.9 5.46,75.82 6.6,76.96 R1_6.1
EN_7  (via drill 0.35)
  Top 0.305: IC1_7.2 30.99,75.28 v31.37,74.9
  Bottom 0.305: 33.65,76.7 R1_7.1 | 33.63,76.68 R1_7.1 | v31.37,74.9 31.37,75.82 32.51,76.96 R1_7.1
EN_8  (via drill 0.35)
  Top 0.305: IC1_8.2 56.9,75.28 v57.28,74.9
  Bottom 0.305: 59.56,76.7 R1_8.1 | 59.54,76.68 R1_8.1 | v57.28,74.9 57.28,75.82 58.42,76.96 R1_8.1
GND  (via drill 0.35)
  Top 0.305: LED1.C 5.24,5.43 v5.71,4.95
  Top 0.813: IC1.9 | IC1.9 4.07,12.19 | IC1.18 20.39,24.2 19.33,23.14 19.33,22.32 20.32,21.34 v20.32,20.95 | IC1.9 4.71,12.2 v5.59,13.08 | IC1.13 19.75,16.7 v18.92,17.53
  Bottom 1.219: C4.2 C1.2 | C2.2 C3.2
  pour Bottom: 0.25,25.91 25.65,25.91 25.65,2.79 23.11,0.25 0.25,0.25
GND_1  (via drill 0.35)
  Top 0.305: LED1_1.C 31.14,5.43 v31.62,4.95
  Top 0.813: IC1_1.9 | IC1_1.9 29.98,12.19 | IC1_1.18 46.3,24.2 45.24,23.14 45.24,22.32 46.23,21.34 v46.23,20.95 | IC1_1.9 30.62,12.2 v31.5,13.08 | IC1_1.13 45.65,16.7 v44.83,17.53
  Bottom 1.219: C4_1.2 C1_1.2 | C2_1.2 C3_1.2
  pour Bottom: 26.16,25.91 51.56,25.91 51.56,2.79 49.02,0.25 26.16,0.25
GND_2  (via drill 0.35)
  Top 0.305: LED1_2.C 57.05,5.43 v57.53,4.95
  Top 0.813: IC1_2.9 | IC1_2.9 | IC1_2.18 72.21,24.2 71.15,23.14 71.15,22.32 72.14,21.34 v72.14,20.95 | IC1_2.9 56.53,12.2 v57.4,13.08 | IC1_2.13 71.56,16.7 v70.74,17.53
  Bottom 1.219: C4_2.2 C1_2.2 | C2_2.2 C3_2.2
  pour Bottom: 52.07,25.91 77.47,25.91 77.47,2.79 74.93,0.25 52.07,0.25
GND_3  (via drill 0.35)
  Top 0.305: LED1_3.C 5.24,31.72 v5.71,31.24
  Top 0.813: IC1_3.9 | IC1_3.9 4.07,38.48 | IC1_3.18 20.39,50.49 19.33,49.43 19.33,48.61 20.32,47.62 v20.32,47.24 | IC1_3.9 4.71,38.49 v5.59,39.37 | IC1_3.13 19.75,42.99 v18.92,43.81
  Bottom 1.219: C4_3.2 C1_3.2 | C2_3.2 C3_3.2
  pour Bottom: 0.25,52.2 25.65,52.2 25.65,29.08 23.11,26.54 0.25,26.54
GND_4  (via drill 0.35)
  Top 0.305: LED1_4.C 31.14,31.72 v31.62,31.24
  Top 0.813: IC1_4.9 | IC1_4.9 29.98,38.48 | IC1_4.18 46.3,50.49 45.24,49.43 45.24,48.61 46.23,47.62 v46.23,47.24 | IC1_4.9 30.62,38.49 v31.5,39.37 | IC1_4.13 45.65,42.99 v44.83,43.81
  Bottom 1.219: C4_4.2 C1_4.2 | C2_4.2 C3_4.2
  pour Bottom: 26.16,52.2 51.56,52.2 51.56,29.08 49.02,26.54 26.16,26.54
GND_5  (via drill 0.35)
  Top 0.305: LED1_5.C 57.05,31.72 v57.53,31.24
  Top 0.813: IC1_5.9 | IC1_5.9 | IC1_5.18 72.21,50.49 71.15,49.43 71.15,48.61 72.14,47.62 v72.14,47.24 | IC1_5.9 56.53,38.49 v57.4,39.37 | IC1_5.13 71.56,42.99 v70.74,43.81
  Bottom 1.219: C4_5.2 C1_5.2 | C2_5.2 C3_5.2
  pour Bottom: 52.07,52.2 77.47,52.2 77.47,29.08 74.93,26.54 52.07,26.54
GND_6  (via drill 0.35)
  Top 0.305: LED1_6.C 5.24,58.01 v5.71,57.53
  Top 0.813: IC1_6.9 | IC1_6.9 4.07,64.77 | IC1_6.18 20.39,76.78 19.33,75.72 19.33,74.9 20.32,73.91 v20.32,73.53 | IC1_6.9 4.71,64.78 v5.59,65.66 | IC1_6.13 19.75,69.28 v18.92,70.1
  Bottom 1.219: C4_6.2 C1_6.2 | C2_6.2 C3_6.2
  pour Bottom: 0.25,78.49 25.65,78.49 25.65,55.37 23.11,52.83 0.25,52.83
GND_7  (via drill 0.35)
  Top 0.305: LED1_7.C 31.14,58.01 v31.62,57.53
  Top 0.813: IC1_7.9 | IC1_7.9 29.98,64.77 | IC1_7.18 46.3,76.78 45.24,75.72 45.24,74.9 46.23,73.91 v46.23,73.53 | IC1_7.9 30.62,64.78 v31.5,65.66 | IC1_7.13 45.65,69.28 v44.83,70.1
  Bottom 1.219: C4_7.2 C1_7.2 | C2_7.2 C3_7.2
  pour Bottom: 26.16,78.49 51.56,78.49 51.56,55.37 49.02,52.83 26.16,52.83
GND_8  (via drill 0.35)
  Top 0.305: LED1_8.C 57.05,58.01 v57.53,57.53
  Top 0.813: IC1_8.9 | IC1_8.9 | IC1_8.18 72.21,76.78 71.15,75.72 71.15,74.9 72.14,73.91 v72.14,73.53 | IC1_8.9 56.53,64.78 v57.4,65.66 | IC1_8.13 71.56,69.28 v70.74,70.1
  Bottom 1.219: C4_8.2 C1_8.2 | C2_8.2 C3_8.2
  pour Bottom: 52.07,78.49 77.47,78.49 77.47,55.37 74.93,52.83 52.07,52.83
INT
  Top 0.305: U$1.P$15 23.11,18.03 23.11,12.45 22.87,12.2 IC1.10
INT_1
  Top 0.305: U$1_1.P$15 49.02,18.03 49.02,12.45 48.78,12.2 IC1_1.10
INT_2
  Top 0.305: U$1_2.P$15 74.93,18.03 74.93,12.45 74.69,12.2 IC1_2.10
INT_3
  Top 0.305: U$1_3.P$15 23.11,44.32 23.11,38.73 22.87,38.49 IC1_3.10
INT_4
  Top 0.305: U$1_4.P$15 49.02,44.32 49.02,38.73 48.78,38.49 IC1_4.10
INT_5
  Top 0.305: U$1_5.P$15 74.93,44.32 74.93,38.73 74.69,38.49 IC1_5.10
INT_6
  Top 0.305: U$1_6.P$15 23.11,70.61 23.11,65.02 22.87,64.78 IC1_6.10
INT_7
  Top 0.305: U$1_7.P$15 49.02,70.61 49.02,65.02 48.78,64.78 IC1_7.10
INT_8
  Top 0.305: U$1_8.P$15 74.93,70.61 74.93,65.02 74.69,64.78 IC1_8.10
IO16  (via drill 0.35)
  Top 0.305: IC1.17 20.35,22.7 v20.32,22.73
  Bottom 0.305: v20.32,22.73 21.21,23.62 R4.2
IO16_1  (via drill 0.35)
  Top 0.305: IC1_1.17 46.26,22.7 v46.23,22.73
  Bottom 0.305: v46.23,22.73 47.12,23.62 R4_1.2
IO16_2  (via drill 0.35)
  Top 0.305: IC1_2.17 72.17,22.7 v72.14,22.73
  Bottom 0.305: v72.14,22.73 73.03,23.62 R4_2.2
IO16_3  (via drill 0.35)
  Top 0.305: IC1_3.17 20.35,48.99 v20.32,49.02
  Bottom 0.305: v20.32,49.02 21.21,49.91 R4_3.2
IO16_4  (via drill 0.35)
  Top 0.305: IC1_4.17 46.26,48.99 v46.23,49.02
  Bottom 0.305: v46.23,49.02 47.12,49.91 R4_4.2
IO16_5  (via drill 0.35)
  Top 0.305: IC1_5.17 72.17,48.99 v72.14,49.02
  Bottom 0.305: v72.14,49.02 73.03,49.91 R4_5.2
IO16_6  (via drill 0.35)
  Top 0.305: IC1_6.17 20.35,75.28 v20.32,75.31
  Bottom 0.305: v20.32,75.31 21.21,76.2 R4_6.2
IO16_7  (via drill 0.35)
  Top 0.305: IC1_7.17 46.26,75.28 v46.23,75.31
  Bottom 0.305: v46.23,75.31 47.12,76.2 R4_7.2
IO16_8  (via drill 0.35)
  Top 0.305: IC1_8.17 72.17,75.28 v72.14,75.31
  Bottom 0.305: v72.14,75.31 73.03,76.2 R4_8.2
MISO  (via drill 0.35)
  Top 0.305: v5.59,17.4 5.59,17.78 5.16,18.2 IC1.5
  Bottom 0.305: v5.59,17.4 5.13,16.94 4.72,16.94 2.69,14.91 2.69,13.74 1.52,12.57 U$1.P$5
MISO_1  (via drill 0.35)
  Top 0.305: v31.5,17.4 31.5,17.78 31.07,18.2 IC1_1.5
  Bottom 0.305: v31.5,17.4 31.04,16.94 30.63,16.94 28.6,14.91 28.6,13.74 27.43,12.57 U$1_1.P$5
MISO_2  (via drill 0.35)
  Top 0.305: v57.4,17.4 57.4,17.78 56.98,18.2 IC1_2.5
  Bottom 0.305: v57.4,17.4 56.95,16.94 56.54,16.94 54.51,14.91 54.51,13.74 53.34,12.57 U$1_2.P$5
MISO_3  (via drill 0.35)
  Top 0.305: v5.59,43.69 5.59,44.07 5.16,44.49 IC1_3.5
  Bottom 0.305: v5.59,43.69 5.13,43.23 4.72,43.23 2.69,41.2 2.69,40.03 1.52,38.86 U$1_3.P$5
MISO_4  (via drill 0.35)
  Top 0.305: v31.5,43.69 31.5,44.07 31.07,44.49 IC1_4.5
  Bottom 0.305: v31.5,43.69 31.04,43.23 30.63,43.23 28.6,41.2 28.6,40.03 27.43,38.86 U$1_4.P$5
MISO_5  (via drill 0.35)
  Top 0.305: v57.4,43.69 57.4,44.07 56.98,44.49 IC1_5.5
  Bottom 0.305: v57.4,43.69 56.95,43.23 56.54,43.23 54.51,41.2 54.51,40.03 53.34,38.86 U$1_5.P$5
MISO_6  (via drill 0.35)
  Top 0.305: v5.59,69.98 5.59,70.36 5.16,70.78 IC1_6.5
  Bottom 0.305: v5.59,69.98 5.13,69.52 4.72,69.52 2.69,67.49 2.69,66.32 1.52,65.15 U$1_6.P$5
MISO_7  (via drill 0.35)
  Top 0.305: v31.5,69.98 31.5,70.36 31.07,70.78 IC1_7.5
  Bottom 0.305: v31.5,69.98 31.04,69.52 30.63,69.52 28.6,67.49 28.6,66.32 27.43,65.15 U$1_7.P$5
MISO_8  (via drill 0.35)
  Top 0.305: v57.4,69.98 57.4,70.36 56.98,70.78 IC1_8.5
  Bottom 0.305: v57.4,69.98 56.95,69.52 56.54,69.52 54.51,67.49 54.51,66.32 53.34,65.15 U$1_8.P$5
MOSI  (via drill 0.35)
  Top 0.305: 4.45,19.7 IC1.4 4.93,19.7 6.32,18.32 6.32,16.86 v6.1,16.64
  Bottom 0.305: v6.1,16.64 5.84,16.38 4.95,16.38 3.35,14.78 3.35,13.51 2.69,12.85 2.69,11.2 1.52,10.03 U$1.P$6
MOSI_1  (via drill 0.35)
  Top 0.305: 30.36,19.7 IC1_1.4 30.84,19.7 32.23,18.32 32.23,16.86 v32,16.64
  Bottom 0.305: v32,16.64 31.75,16.38 30.86,16.38 29.26,14.78 29.26,13.51 28.6,12.85 28.6,11.2 27.43,10.03 U$1_1.P$6
MOSI_2  (via drill 0.35)
  Top 0.305: 56.27,19.7 IC1_2.4 56.75,19.7 58.14,18.32 58.14,16.86 v57.91,16.64
  Bottom 0.305: v57.91,16.64 57.66,16.38 56.77,16.38 55.17,14.78 55.17,13.51 54.51,12.85 54.51,11.2 53.34,10.03 U$1_2.P$6
MOSI_3  (via drill 0.35)
  Top 0.305: 4.45,45.99 IC1_3.4 4.93,45.99 6.32,44.6 6.32,43.15 v6.1,42.93
  Bottom 0.305: v6.1,42.93 5.84,42.67 4.95,42.67 3.35,41.07 3.35,39.8 2.69,39.14 2.69,37.49 1.52,36.32 U$1_3.P$6
MOSI_4  (via drill 0.35)
  Top 0.305: 30.36,45.99 IC1_4.4 30.84,45.99 32.23,44.6 32.23,43.15 v32,42.93
  Bottom 0.305: v32,42.93 31.75,42.67 30.86,42.67 29.26,41.07 29.26,39.8 28.6,39.14 28.6,37.49 27.43,36.32 U$1_4.P$6
MOSI_5  (via drill 0.35)
  Top 0.305: 56.27,45.99 IC1_5.4 56.75,45.99 58.14,44.6 58.14,43.15 v57.91,42.93
  Bottom 0.305: v57.91,42.93 57.66,42.67 56.77,42.67 55.17,41.07 55.17,39.8 54.51,39.14 54.51,37.49 53.34,36.32 U$1_5.P$6
MOSI_6  (via drill 0.35)
  Top 0.305: 4.45,72.28 IC1_6.4 4.93,72.28 6.32,70.89 6.32,69.44 v6.1,69.22
  Bottom 0.305: v6.1,69.22 5.84,68.96 4.95,68.96 3.35,67.36 3.35,66.09 2.69,65.43 2.69,63.78 1.52,62.61 U$1_6.P$6
MOSI_7  (via drill 0.35)
  Top 0.305: 30.36,72.28 IC1_7.4 30.84,72.28 32.23,70.89 32.23,69.44 v32,69.22
  Bottom 0.305: v32,69.22 31.75,68.96 30.86,68.96 29.26,67.36 29.26,66.09 28.6,65.43 28.6,63.78 27.43,62.61 U$1_7.P$6
MOSI_8  (via drill 0.35)
  Top 0.305: 56.27,72.28 IC1_8.4 56.75,72.28 58.14,70.89 58.14,69.44 v57.91,69.22
  Bottom 0.305: v57.91,69.22 57.66,68.96 56.77,68.96 55.17,67.36 55.17,66.09 54.51,65.43 54.51,63.78 53.34,62.61 U$1_8.P$6
N$1  (via drill 0.35)
  Top 0.305: IC1.7 5.47,15.2 5.79,14.89 6.4,14.89 6.88,15.37 6.88,18.55 6.35,19.08 v6.35,19.45
  Bottom 0.305: v6.35,19.45 7.47,20.57 R2.1
N$1_1  (via drill 0.35)
  Top 0.305: IC1_1.7 31.38,15.2 31.7,14.89 32.31,14.89 32.79,15.37 32.79,18.55 32.26,19.08 v32.26,19.45
  Bottom 0.305: v32.26,19.45 33.38,20.57 R2_1.1
N$1_2  (via drill 0.35)
  Top 0.305: IC1_2.7 57.29,15.2 57.61,14.89 58.22,14.89 58.7,15.37 58.7,18.55 58.17,19.08 v58.17,19.45
  Bottom 0.305: v58.17,19.45 59.29,20.57 R2_2.1
N$1_3  (via drill 0.35)
  Top 0.305: IC1_3.7 5.47,41.49 5.79,41.18 6.4,41.18 6.88,41.66 6.88,44.84 6.35,45.37 v6.35,45.74
  Bottom 0.305: v6.35,45.74 7.47,46.86 R2_3.1
N$1_4  (via drill 0.35)
  Top 0.305: IC1_4.7 31.38,41.49 31.7,41.18 32.31,41.18 32.79,41.66 32.79,44.84 32.26,45.37 v32.26,45.74
  Bottom 0.305: v32.26,45.74 33.38,46.86 R2_4.1
N$1_5  (via drill 0.35)
  Top 0.305: IC1_5.7 57.29,41.49 57.61,41.18 58.22,41.18 58.7,41.66 58.7,44.84 58.17,45.37 v58.17,45.74
  Bottom 0.305: v58.17,45.74 59.29,46.86 R2_5.1
N$1_6  (via drill 0.35)
  Top 0.305: IC1_6.7 5.47,67.78 5.79,67.47 6.4,67.47 6.88,67.95 6.88,71.13 6.35,71.66 v6.35,72.03
  Bottom 0.305: v6.35,72.03 7.47,73.15 R2_6.1
N$1_7  (via drill 0.35)
  Top 0.305: IC1_7.7 31.38,67.78 31.7,67.47 32.31,67.47 32.79,67.95 32.79,71.13 32.26,71.66 v32.26,72.03
  Bottom 0.305: v32.26,72.03 33.38,73.15 R2_7.1
N$1_8  (via drill 0.35)
  Top 0.305: IC1_8.7 57.29,67.78 57.61,67.47 58.22,67.47 58.7,67.95 58.7,71.13 58.17,71.66 v58.17,72.03
  Bottom 0.305: v58.17,72.03 59.29,73.15 R2_8.1
N$4  (via drill 0.35)
  Top 0.305: 4.12,16.76 IC1.6 4.76,16.7 5.7,15.76 5.71,15.76 5.82,15.65 v6.12,15.65
  Bottom 0.305: v6.12,15.65 7.27,15.65 7.72,16.1 R5.1
N$4_1  (via drill 0.35)
  Top 0.305: 30.03,16.76 IC1_1.6 30.67,16.7 31.61,15.76 31.73,15.65 v32.03,15.65
  Bottom 0.305: v32.03,15.65 33.17,15.65 33.63,16.1 R5_1.1
N$4_2  (via drill 0.35)
  Top 0.305: 55.94,16.76 IC1_2.6 56.58,16.7 57.52,15.76 57.64,15.65 v57.94,15.65
  Bottom 0.305: v57.94,15.65 59.08,15.65 59.54,16.1 R5_2.1
N$4_3  (via drill 0.35)
  Top 0.305: 4.12,43.05 IC1_3.6 4.76,42.99 5.7,42.05 5.71,42.05 5.82,41.94 v6.12,41.94
  Bottom 0.305: v6.12,41.94 7.27,41.94 7.72,42.39 R5_3.1
N$4_4  (via drill 0.35)
  Top 0.305: 30.03,43.05 IC1_4.6 30.67,42.99 31.61,42.05 31.73,41.94 v32.03,41.94
  Bottom 0.305: v32.03,41.94 33.17,41.94 33.63,42.39 R5_4.1
N$4_5  (via drill 0.35)
  Top 0.305: 55.94,43.05 IC1_5.6 56.58,42.99 57.52,42.05 57.64,41.94 v57.94,41.94
  Bottom 0.305: v57.94,41.94 59.08,41.94 59.54,42.39 R5_5.1
N$4_6  (via drill 0.35)
  Top 0.305: 4.12,69.34 IC1_6.6 4.76,69.28 5.7,68.34 5.71,68.34 5.82,68.23 v6.12,68.23
  Bottom 0.305: v6.12,68.23 7.27,68.23 7.72,68.68 R5_6.1
N$4_7  (via drill 0.35)
  Top 0.305: 30.03,69.34 IC1_7.6 30.67,69.28 31.61,68.34 31.73,68.23 v32.03,68.23
  Bottom 0.305: v32.03,68.23 33.17,68.23 33.63,68.68 R5_7.1
N$4_8  (via drill 0.35)
  Top 0.305: 55.94,69.34 IC1_8.6 56.58,69.28 57.52,68.34 57.64,68.23 v57.94,68.23
  Bottom 0.305: v57.94,68.23 59.08,68.23 59.54,68.68 R5_8.1
PROG  (via drill 0.35)
  Top 0.305: IC1.8 3.95,13.59 4.7,13.59 v5.33,14.22 5.44,14.33 6.63,14.33 | JP1.5 18.03,2.79 17.27,2.03 v9.14,2.03 | v4.57,2.03 3.43,3.17 3.43,9.78 5.04,11.39 5.05,11.39 6.6,12.95 6.6,14.3 6.63,14.33 | 6.63,14.33 7.44,15.14 7.44,19.4 6.65,20.19 v5.72,20.19 v5.71,20.19
  Bottom 0.305: R3.1 6.96,14.22 v5.33,14.22 | v9.14,2.03 v4.57,2.03 | v5.71,20.19 5.71,19.91 5.08,19.28 4.35,19.28 3.77,19.86 3.76,19.86 1.78,21.84 U$1.P$1
PROG_1  (via drill 0.35)
  Top 0.305: IC1_1.8 29.86,13.59 30.61,13.59 v31.24,14.22 31.35,14.33 32.54,14.33 | JP1_1.5 43.94,2.79 43.18,2.03 v35.05,2.03 | v30.48,2.03 29.34,3.17 29.34,9.78 30.95,11.39 30.96,11.39 32.51,12.95 32.51,14.3 32.54,14.33 | 32.54,14.33 33.35,15.14 33.35,19.4 32.56,20.19 v31.63,20.19 v31.62,20.19
  Bottom 0.305: R3_1.1 32.87,14.22 v31.24,14.22 | v35.05,2.03 v30.48,2.03 | v31.62,20.19 31.62,19.91 30.99,19.28 30.26,19.28 29.67,19.86 27.69,21.84 U$1_1.P$1
PROG_2  (via drill 0.35)
  Top 0.305: IC1_2.8 55.76,13.59 56.52,13.59 v57.15,14.22 57.25,14.33 58.45,14.33 | JP1_2.5 69.85,2.79 69.09,2.03 v60.96,2.03 | v56.39,2.03 55.24,3.17 55.24,9.78 56.86,11.39 58.42,12.95 58.42,14.3 58.45,14.33 | 58.45,14.33 59.26,15.14 59.26,19.4 58.47,20.19 v57.54,20.19 v57.53,20.19
  Bottom 0.305: R3_2.1 58.78,14.22 v57.15,14.22 | v60.96,2.03 v56.39,2.03 | v57.53,20.19 57.53,19.91 56.9,19.28 56.17,19.28 55.58,19.86 53.59,21.84 U$1_2.P$1
PROG_3  (via drill 0.35)
  Top 0.305: IC1_3.8 3.95,39.88 4.7,39.88 v5.33,40.51 5.44,40.62 6.63,40.62 | JP1_3.5 18.03,29.08 17.27,28.32 v9.14,28.32 | v4.57,28.32 3.43,29.46 3.43,36.07 5.04,37.68 5.05,37.68 6.6,39.24 6.6,40.59 6.63,40.62 | 6.63,40.62 7.44,41.42 7.44,45.69 6.65,46.48 v5.72,46.48 v5.71,46.48
  Bottom 0.305: R3_3.1 6.96,40.51 v5.33,40.51 | v9.14,28.32 v4.57,28.32 | v5.71,46.48 5.71,46.2 5.08,45.57 4.35,45.57 3.77,46.15 3.76,46.15 1.78,48.13 U$1_3.P$1
PROG_4  (via drill 0.35)
  Top 0.305: IC1_4.8 29.86,39.88 30.61,39.88 v31.24,40.51 31.35,40.62 32.54,40.62 | JP1_4.5 43.94,29.08 43.18,28.32 v35.05,28.32 | v30.48,28.32 29.34,29.46 29.34,36.07 30.95,37.68 30.96,37.68 32.51,39.24 32.51,40.59 32.54,40.62 | 32.54,40.62 33.35,41.42 33.35,45.69 32.56,46.48 v31.63,46.48 v31.62,46.48
  Bottom 0.305: R3_4.1 32.87,40.51 v31.24,40.51 | v35.05,28.32 v30.48,28.32 | v31.62,46.48 31.62,46.2 30.99,45.57 30.26,45.57 29.67,46.15 27.69,48.13 U$1_4.P$1
PROG_5  (via drill 0.35)
  Top 0.305: IC1_5.8 55.76,39.88 56.52,39.88 v57.15,40.51 57.25,40.62 58.45,40.62 | JP1_5.5 69.85,29.08 69.09,28.32 v60.96,28.32 | v56.39,28.32 55.24,29.46 55.24,36.07 56.86,37.68 58.42,39.24 58.42,40.59 58.45,40.62 | 58.45,40.62 59.26,41.42 59.26,45.69 58.47,46.48 v57.54,46.48 v57.53,46.48
  Bottom 0.305: R3_5.1 58.78,40.51 v57.15,40.51 | v60.96,28.32 v56.39,28.32 | v57.53,46.48 57.53,46.2 56.9,45.57 56.17,45.57 55.58,46.15 53.59,48.13 U$1_5.P$1
PROG_6  (via drill 0.35)
  Top 0.305: IC1_6.8 3.95,66.17 4.7,66.17 v5.33,66.8 5.44,66.91 6.63,66.91 | JP1_6.5 18.03,55.37 17.27,54.61 v9.14,54.61 | v4.57,54.61 3.43,55.75 3.43,62.36 5.04,63.97 5.05,63.97 6.6,65.53 6.6,66.88 6.63,66.91 | 6.63,66.91 7.44,67.71 7.44,71.98 6.65,72.77 v5.72,72.77 v5.71,72.77
  Bottom 0.305: R3_6.1 6.96,66.8 v5.33,66.8 | v9.14,54.61 v4.57,54.61 | v5.71,72.77 5.71,72.49 5.08,71.86 4.35,71.86 3.77,72.44 3.76,72.44 1.78,74.42 U$1_6.P$1
PROG_7  (via drill 0.35)
  Top 0.305: IC1_7.8 29.86,66.17 30.61,66.17 v31.24,66.8 31.35,66.91 32.54,66.91 | JP1_7.5 43.94,55.37 43.18,54.61 v35.05,54.61 | v30.48,54.61 29.34,55.75 29.34,62.36 30.95,63.97 30.96,63.97 32.51,65.53 32.51,66.88 32.54,66.91 | 32.54,66.91 33.35,67.71 33.35,71.98 32.56,72.77 v31.63,72.77 v31.62,72.77
  Bottom 0.305: R3_7.1 32.87,66.8 v31.24,66.8 | v35.05,54.61 v30.48,54.61 | v31.62,72.77 31.62,72.49 30.99,71.86 30.26,71.86 29.67,72.44 27.69,74.42 U$1_7.P$1
PROG_8  (via drill 0.35)
  Top 0.305: IC1_8.8 55.76,66.17 56.52,66.17 v57.15,66.8 57.25,66.91 58.45,66.91 | JP1_8.5 69.85,55.37 69.09,54.61 v60.96,54.61 | v56.39,54.61 55.24,55.75 55.24,62.36 56.86,63.97 58.42,65.53 58.42,66.88 58.45,66.91 | 58.45,66.91 59.26,67.71 59.26,71.98 58.47,72.77 v57.54,72.77 v57.53,72.77
  Bottom 0.305: R3_8.1 58.78,66.8 v57.15,66.8 | v60.96,54.61 v56.39,54.61 | v57.53,72.77 57.53,72.49 56.9,71.86 56.17,71.86 55.58,72.44 53.59,74.42 U$1_8.P$1
RST  (via drill 0.35)
  Top 0.305: IC1.15 v20.57,19.7 19.29,19.7 17.55,21.43 15.44,21.43 v14.79,20.77 | v20.32,12.45 20.32,4.32 JP1.6
  Bottom 0.305: U$1.P$2 3.53,19.3 4.12,18.72 12.73,18.72 v14.79,20.77 | v20.57,19.7 20.57,17.8 18.57,15.8 18.57,14.3 20.32,12.55 v20.32,12.45
RST_1  (via drill 0.35)
  Top 0.305: IC1_1.15 v46.48,19.7 45.19,19.7 43.46,21.43 41.35,21.43 v40.69,20.77 | v46.23,12.45 46.23,4.32 JP1_1.6
  Bottom 0.305: U$1_1.P$2 29.44,19.3 30.03,18.72 38.64,18.72 v40.69,20.77 | v46.48,19.7 46.48,17.8 44.48,15.8 44.48,14.3 46.23,12.55 v46.23,12.45
RST_2  (via drill 0.35)
  Top 0.305: IC1_2.15 v72.39,19.7 71.1,19.7 69.37,21.43 67.26,21.43 v66.6,20.77 | v72.14,12.45 72.14,4.32 JP1_2.6
  Bottom 0.305: U$1_2.P$2 55.35,19.3 55.93,18.72 64.55,18.72 v66.6,20.77 | v72.39,19.7 72.39,17.8 70.39,15.8 70.39,14.3 72.14,12.55 v72.14,12.45
RST_3  (via drill 0.35)
  Top 0.305: IC1_3.15 v20.57,45.99 19.29,45.99 17.55,47.72 15.44,47.72 v14.79,47.06 | v20.32,38.73 20.32,30.61 JP1_3.6
  Bottom 0.305: U$1_3.P$2 3.53,45.59 4.12,45.01 12.73,45.01 v14.79,47.06 | v20.57,45.99 20.57,44.09 18.57,42.09 18.57,40.59 20.32,38.84 v20.32,38.73
RST_4  (via drill 0.35)
  Top 0.305: IC1_4.15 v46.48,45.99 45.19,45.99 43.46,47.72 41.35,47.72 v40.69,47.06 | v46.23,38.73 46.23,30.61 JP1_4.6
  Bottom 0.305: U$1_4.P$2 29.44,45.59 30.03,45.01 38.64,45.01 v40.69,47.06 | v46.48,45.99 46.48,44.09 44.48,42.09 44.48,40.59 46.23,38.84 v46.23,38.73
RST_5  (via drill 0.35)
  Top 0.305: IC1_5.15 v72.39,45.99 71.1,45.99 69.37,47.72 67.26,47.72 v66.6,47.06 | v72.14,38.73 72.14,30.61 JP1_5.6
  Bottom 0.305: U$1_5.P$2 55.35,45.59 55.93,45.01 64.55,45.01 v66.6,47.06 | v72.39,45.99 72.39,44.09 70.39,42.09 70.39,40.59 72.14,38.84 v72.14,38.73
RST_6  (via drill 0.35)
  Top 0.305: IC1_6.15 v20.57,72.28 19.29,72.28 17.55,74.01 15.44,74.01 v14.79,73.35 | v20.32,65.02 20.32,56.9 JP1_6.6
  Bottom 0.305: U$1_6.P$2 3.53,71.88 4.12,71.3 12.73,71.3 v14.79,73.35 | v20.57,72.28 20.57,70.38 18.57,68.38 18.57,66.88 20.32,65.13 v20.32,65.02
RST_7  (via drill 0.35)
  Top 0.305: IC1_7.15 v46.48,72.28 45.19,72.28 43.46,74.01 41.35,74.01 v40.69,73.35 | v46.23,65.02 46.23,56.9 JP1_7.6
  Bottom 0.305: U$1_7.P$2 29.44,71.88 30.03,71.3 38.64,71.3 v40.69,73.35 | v46.48,72.28 46.48,70.38 44.48,68.38 44.48,66.88 46.23,65.13 v46.23,65.02
RST_8  (via drill 0.35)
  Top 0.305: IC1_8.15 v72.39,72.28 71.1,72.28 69.37,74.01 67.26,74.01 v66.6,73.35 | v72.14,65.02 72.14,56.9 JP1_8.6
  Bottom 0.305: U$1_8.P$2 55.35,71.88 55.93,71.3 64.55,71.3 v66.6,73.35 | v72.39,72.28 72.39,70.38 70.39,68.38 70.39,66.88 72.14,65.13 v72.14,65.02
RX  (via drill 0.35)
  Top 0.305: IC1.12 20.23,15.2 v20.19,15.24 19.03,14.07 19.03,7.65 18.03,6.66 16.82,6.66 16.38,6.22 15.11,6.22 JP1.3
  Bottom 0.305: U$1.P$14 23.11,15.49 20.57,15.49 20.32,15.24 v20.19,15.24
RX_1  (via drill 0.35)
  Top 0.305: IC1_1.12 46.14,15.2 v46.1,15.24 44.94,14.07 44.94,7.65 43.94,6.66 42.72,6.66 42.29,6.22 41.02,6.22 JP1_1.3
  Bottom 0.305: U$1_1.P$14 49.02,15.49 46.48,15.49 46.23,15.24 v46.1,15.24
RX_2  (via drill 0.35)
  Top 0.305: IC1_2.12 72.05,15.2 v72.01,15.24 70.84,14.07 70.84,7.65 69.85,6.66 68.63,6.66 68.2,6.22 66.93,6.22 JP1_2.3
  Bottom 0.305: U$1_2.P$14 74.93,15.49 72.39,15.49 72.14,15.24 v72.01,15.24
RX_3  (via drill 0.35)
  Top 0.305: IC1_3.12 20.23,41.49 v20.19,41.53 19.03,40.36 19.03,33.94 18.03,32.94 16.82,32.94 16.38,32.51 15.11,32.51 JP1_3.3
  Bottom 0.305: U$1_3.P$14 23.11,41.78 20.57,41.78 20.32,41.53 v20.19,41.53
RX_4  (via drill 0.35)
  Top 0.305: IC1_4.12 46.14,41.49 v46.1,41.53 44.94,40.36 44.94,33.94 43.94,32.94 42.72,32.94 42.29,32.51 41.02,32.51 JP1_4.3
  Bottom 0.305: U$1_4.P$14 49.02,41.78 46.48,41.78 46.23,41.53 v46.1,41.53
RX_5  (via drill 0.35)
  Top 0.305: IC1_5.12 72.05,41.49 v72.01,41.53 70.84,40.36 70.84,33.94 69.85,32.94 68.63,32.94 68.2,32.51 66.93,32.51 JP1_5.3
  Bottom 0.305: U$1_5.P$14 74.93,41.78 72.39,41.78 72.14,41.53 v72.01,41.53
RX_6  (via drill 0.35)
  Top 0.305: IC1_6.12 20.23,67.78 v20.19,67.82 19.03,66.65 19.03,60.23 18.03,59.23 16.82,59.23 16.38,58.8 15.11,58.8 JP1_6.3
  Bottom 0.305: U$1_6.P$14 23.11,68.07 20.57,68.07 20.32,67.82 v20.19,67.82
RX_7  (via drill 0.35)
  Top 0.305: IC1_7.12 46.14,67.78 v46.1,67.82 44.94,66.65 44.94,60.23 43.94,59.23 42.72,59.23 42.29,58.8 41.02,58.8 JP1_7.3
  Bottom 0.305: U$1_7.P$14 49.02,68.07 46.48,68.07 46.23,67.82 v46.1,67.82
RX_8  (via drill 0.35)
  Top 0.305: IC1_8.12 72.05,67.78 v72.01,67.82 70.84,66.65 70.84,60.23 69.85,59.23 68.63,59.23 68.2,58.8 66.93,58.8 JP1_8.3
  Bottom 0.305: U$1_8.P$14 74.93,68.07 72.39,68.07 72.14,67.82 v72.01,67.82
SCK
  Top 0.305: U$1.P$4 2.79,15.49 2.79,20.57 3.42,21.2 IC1.3
SCK_1
  Top 0.305: U$1_1.P$4 28.7,15.49 28.7,20.57 29.33,21.2 IC1_1.3
SCK_2
  Top 0.305: U$1_2.P$4 54.61,15.49 54.61,20.57 55.24,21.2 IC1_2.3
SCK_3
  Top 0.305: U$1_3.P$4 2.79,41.78 2.79,46.86 3.42,47.49 IC1_3.3
SCK_4
  Top 0.305: U$1_4.P$4 28.7,41.78 28.7,46.86 29.33,47.49 IC1_4.3
SCK_5
  Top 0.305: U$1_5.P$4 54.61,41.78 54.61,46.86 55.24,47.49 IC1_5.3
SCK_6
  Top 0.305: U$1_6.P$4 2.79,68.07 2.79,73.15 3.42,73.78 IC1_6.3
SCK_7
  Top 0.305: U$1_7.P$4 28.7,68.07 28.7,73.15 29.33,73.78 IC1_7.3
SCK_8
  Top 0.305: U$1_8.P$4 54.61,68.07 54.61,73.15 55.24,73.78 IC1_8.3
STAT  (via drill 0.35)
  Top 0.305: v19.3,15.49 18.47,14.66 18.47,7.88 17.8,7.21 16.58,7.21 16.15,6.78 9.45,6.78 8.73,7.49 LED1.A
  Bottom 0.305: v19.3,15.49 20.64,16.84 20.68,16.84 21.34,17.49 21.34,21.46 20.83,21.97 20.04,21.97 19.59,22.43 19.59,22.93 R4.1
STAT_1  (via drill 0.35)
  Top 0.305: v45.21,15.49 44.38,14.66 44.38,7.88 43.71,7.21 42.49,7.21 42.06,6.78 35.35,6.78 34.64,7.49 LED1_1.A
  Bottom 0.305: v45.21,15.49 46.55,16.84 46.59,16.84 47.24,17.49 47.24,21.46 46.74,21.97 45.95,21.97 45.49,22.43 45.49,22.93 R4_1.1
STAT_2  (via drill 0.35)
  Top 0.305: v71.12,15.49 70.28,14.66 70.28,7.88 69.62,7.21 68.4,7.21 67.97,6.78 61.26,6.78 60.55,7.49 LED1_2.A
  Bottom 0.305: v71.12,15.49 72.46,16.84 72.49,16.84 73.15,17.49 73.15,21.46 72.64,21.97 71.86,21.97 71.4,22.43 71.4,22.93 R4_2.1
STAT_3  (via drill 0.35)
  Top 0.305: v19.3,41.78 18.47,40.95 18.47,34.17 17.8,33.5 16.58,33.5 16.15,33.07 9.45,33.07 8.73,33.78 LED1_3.A
  Bottom 0.305: v19.3,41.78 20.64,43.12 20.68,43.12 21.34,43.78 21.34,47.75 20.83,48.26 20.04,48.26 19.59,48.72 19.59,49.22 R4_3.1
STAT_4  (via drill 0.35)
  Top 0.305: v45.21,41.78 44.38,40.95 44.38,34.17 43.71,33.5 42.49,33.5 42.06,33.07 35.35,33.07 34.64,33.78 LED1_4.A
  Bottom 0.305: v45.21,41.78 46.55,43.12 46.59,43.12 47.24,43.78 47.24,47.75 46.74,48.26 45.95,48.26 45.49,48.72 45.49,49.22 R4_4.1
STAT_5  (via drill 0.35)
  Top 0.305: v71.12,41.78 70.28,40.95 70.28,34.17 69.62,33.5 68.4,33.5 67.97,33.07 61.26,33.07 60.55,33.78 LED1_5.A
  Bottom 0.305: v71.12,41.78 72.46,43.12 72.49,43.12 73.15,43.78 73.15,47.75 72.64,48.26 71.86,48.26 71.4,48.72 71.4,49.22 R4_5.1
STAT_6  (via drill 0.35)
  Top 0.305: v19.3,68.07 18.47,67.24 18.47,60.46 17.8,59.79 16.58,59.79 16.15,59.36 9.45,59.36 8.73,60.07 LED1_6.A
  Bottom 0.305: v19.3,68.07 20.64,69.41 20.68,69.41 21.34,70.07 21.34,74.04 20.83,74.55 20.04,74.55 19.59,75.01 19.59,75.51 R4_6.1
STAT_7  (via drill 0.35)
  Top 0.305: v45.21,68.07 44.38,67.24 44.38,60.46 43.71,59.79 42.49,59.79 42.06,59.36 35.35,59.36 34.64,60.07 LED1_7.A
  Bottom 0.305: v45.21,68.07 46.55,69.41 46.59,69.41 47.24,70.07 47.24,74.04 46.74,74.55 45.95,74.55 45.49,75.01 45.49,75.51 R4_7.1
STAT_8  (via drill 0.35)
  Top 0.305: v71.12,68.07 70.28,67.24 70.28,60.46 69.62,59.79 68.4,59.79 67.97,59.36 61.26,59.36 60.55,60.07 LED1_8.A
  Bottom 0.305: v71.12,68.07 72.46,69.41 72.49,69.41 73.15,70.07 73.15,74.04 72.64,74.55 71.86,74.55 71.4,75.01 71.4,75.51 R4_8.1
TX  (via drill 0.35)
  Top 0.305: 20.2,13.7 v20.19,13.72 | v20.19,13.72 21.83,13.72 IC1.11 | JP1.4 17.53,6.1 18.27,6.1 19.59,7.42 19.59,13.11 v20.19,13.72
  Bottom 0.305: v20.19,13.72 20.19,14.22 20.48,14.51 20.5,14.51 20.85,14.86 23.75,14.86 U$1.P$13
TX_1  (via drill 0.35)
  Top 0.305: 46.11,13.7 v46.1,13.72 | v46.1,13.72 47.74,13.72 IC1_1.11 | JP1_1.4 43.43,6.1 44.17,6.1 45.49,7.42 45.49,13.11 v46.1,13.72
  Bottom 0.305: v46.1,13.72 46.1,14.22 46.38,14.51 46.41,14.51 46.76,14.86 49.66,14.86 U$1_1.P$13
TX_2  (via drill 0.35)
  Top 0.305: 72.02,13.7 v72.01,13.72 | v72.01,13.72 73.65,13.72 IC1_2.11 | JP1_2.4 69.34,6.1 70.08,6.1 71.4,7.42 71.4,13.11 v72.01,13.72
  Bottom 0.305: v72.01,13.72 72.01,14.22 72.29,14.51 72.31,14.51 72.67,14.86 75.56,14.86 U$1_2.P$13
TX_3  (via drill 0.35)
  Top 0.305: 20.2,39.99 v20.19,40.01 | v20.19,40.01 21.83,40.01 IC1_3.11 | JP1_3.4 17.53,32.38 18.27,32.38 19.59,33.71 19.59,39.4 v20.19,40.01
  Bottom 0.305: v20.19,40.01 20.19,40.51 20.48,40.8 20.5,40.8 20.85,41.15 23.75,41.15 U$1_3.P$13
TX_4  (via drill 0.35)
  Top 0.305: 46.11,39.99 v46.1,40.01 | v46.1,40.01 47.74,40.01 IC1_4.11 | JP1_4.4 43.43,32.38 44.17,32.38 45.49,33.71 45.49,39.4 v46.1,40.01
  Bottom 0.305: v46.1,40.01 46.1,40.51 46.38,40.8 46.41,40.8 46.76,41.15 49.66,41.15 U$1_4.P$13
TX_5  (via drill 0.35)
  Top 0.305: 72.02,39.99 v72.01,40.01 | v72.01,40.01 73.65,40.01 IC1_5.11 | JP1_5.4 69.34,32.38 70.08,32.38 71.4,33.71 71.4,39.4 v72.01,40.01
  Bottom 0.305: v72.01,40.01 72.01,40.51 72.29,40.8 72.31,40.8 72.67,41.15 75.56,41.15 U$1_5.P$13
TX_6  (via drill 0.35)
  Top 0.305: 20.2,66.28 v20.19,66.29 | v20.19,66.29 21.83,66.29 IC1_6.11 | JP1_6.4 17.53,58.67 18.27,58.67 19.59,59.99 19.59,65.69 v20.19,66.29
  Bottom 0.305: v20.19,66.29 20.19,66.8 20.48,67.08 20.5,67.08 20.85,67.44 23.75,67.44 U$1_6.P$13
TX_7  (via drill 0.35)
  Top 0.305: 46.11,66.28 v46.1,66.29 | v46.1,66.29 47.74,66.29 IC1_7.11 | JP1_7.4 43.43,58.67 44.17,58.67 45.49,59.99 45.49,65.69 v46.1,66.29
  Bottom 0.305: v46.1,66.29 46.1,66.8 46.38,67.08 46.41,67.08 46.76,67.44 49.66,67.44 U$1_7.P$13
TX_8  (via drill 0.35)
  Top 0.305: 72.02,66.28 v72.01,66.29 | v72.01,66.29 73.65,66.29 IC1_8.11 | JP1_8.4 69.34,58.67 70.08,58.67 71.4,59.99 71.4,65.69 v72.01,66.29
  Bottom 0.305: v72.01,66.29 72.01,66.8 72.29,67.08 72.31,67.08 72.67,67.44 75.56,67.44 U$1_8.P$13

## Text on the board
Milling: vcut | vcut | vcut | vcut
Document: BrainPadWiFi 1.01 | BrainPadWiFi 1.01 | BrainPadWiFi 1.01 | STAT | STAT | STAT | 3.3V | GND | TXD | RXD | PG | RST | 3.3V | GND | TXD | RXD | PG | RST | 3.3V | GND | TXD | RXD | PG | RST | BrainPadWiFi 1.01 | BrainPadWiFi 1.01 | BrainPadWiFi 1.01 | STAT | STAT | STAT | 3.3V | GND | TXD | RXD | PG | RST | 3.3V | GND | TXD | RXD | PG | RST | 3.3V | GND | TXD | RXD | PG | RST | BrainPadWiFi 1.01 | BrainPadWiFi 1.01 | BrainPadWiFi 1.01 | STAT | STAT | STAT | 3.3V | GND | TXD | RXD | PG | RST | 3.3V | GND | TXD | RXD | PG | RST | 3.3V | GND | TXD | RXD | PG | RST